# Altium PCB Steering wheel 2020.PcbDoc
Units mm, origin at the board's own origin, x right, y up, seen from the top; angles counter-clockwise.
Board outline 77.5 x 49 mm, 2 copper layers (Top Layer, Bottom Layer); 25 components, 51 nets, 167 pads, 2 vias.
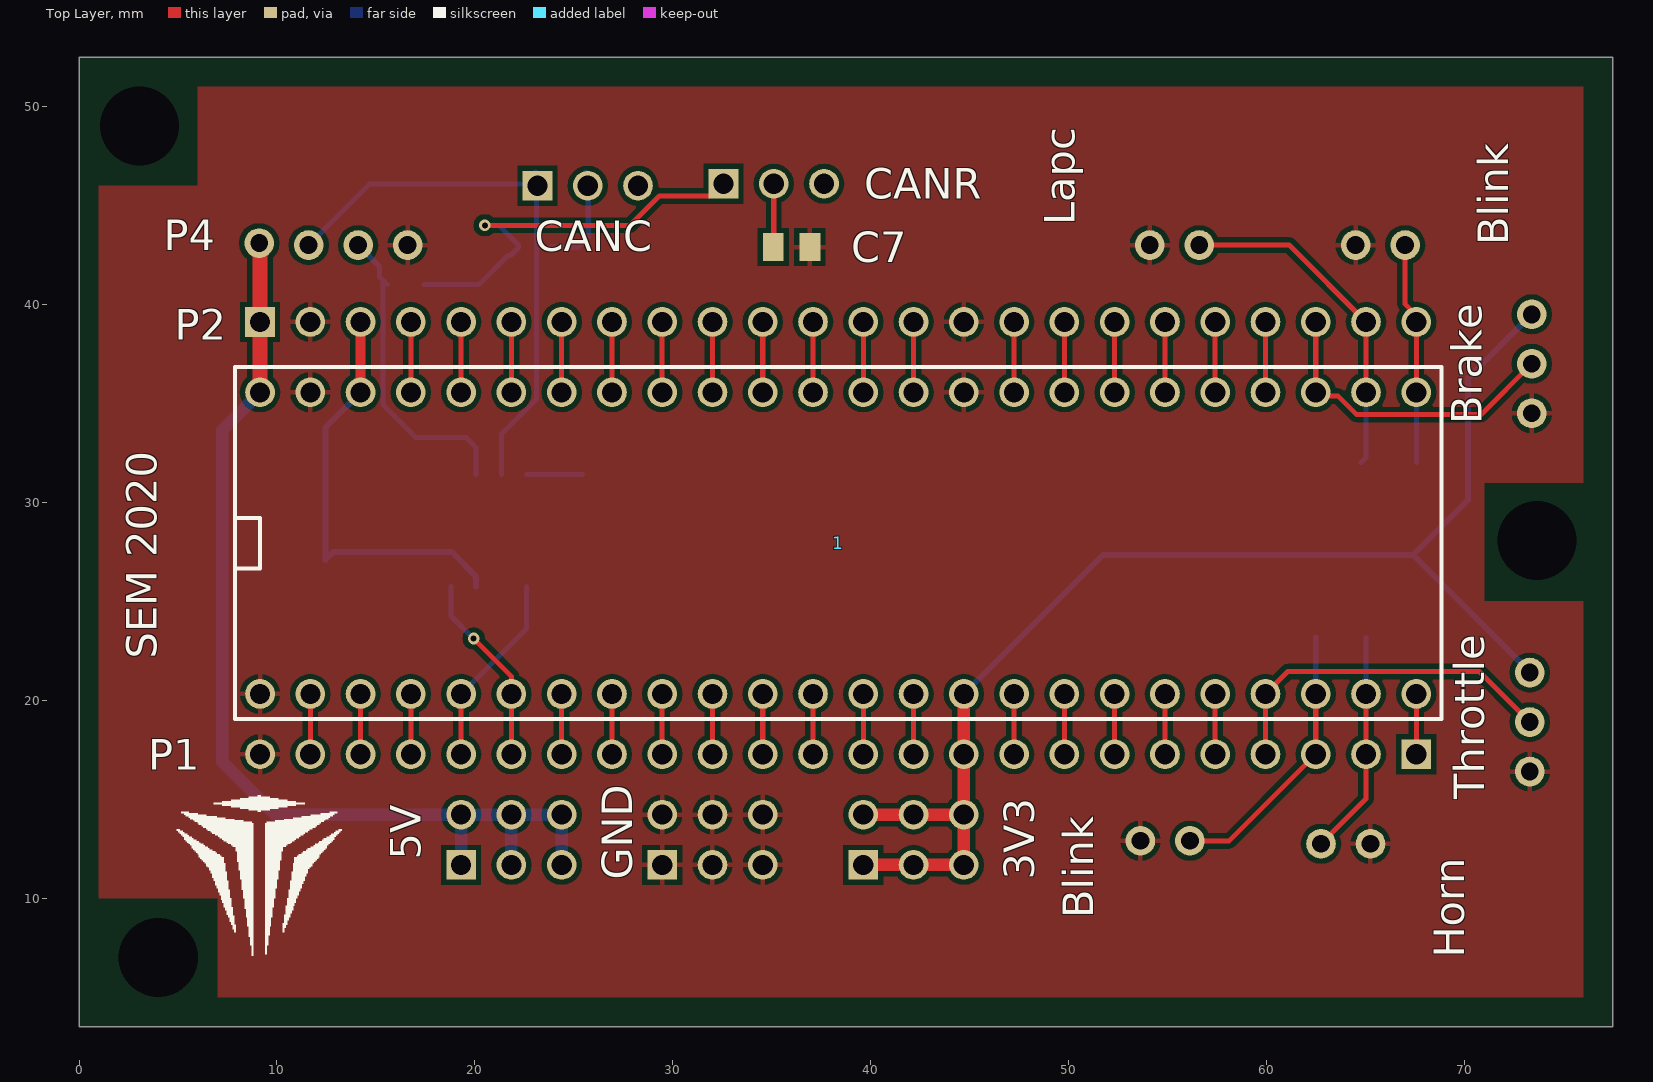
[diagram p0: Top Layer view]
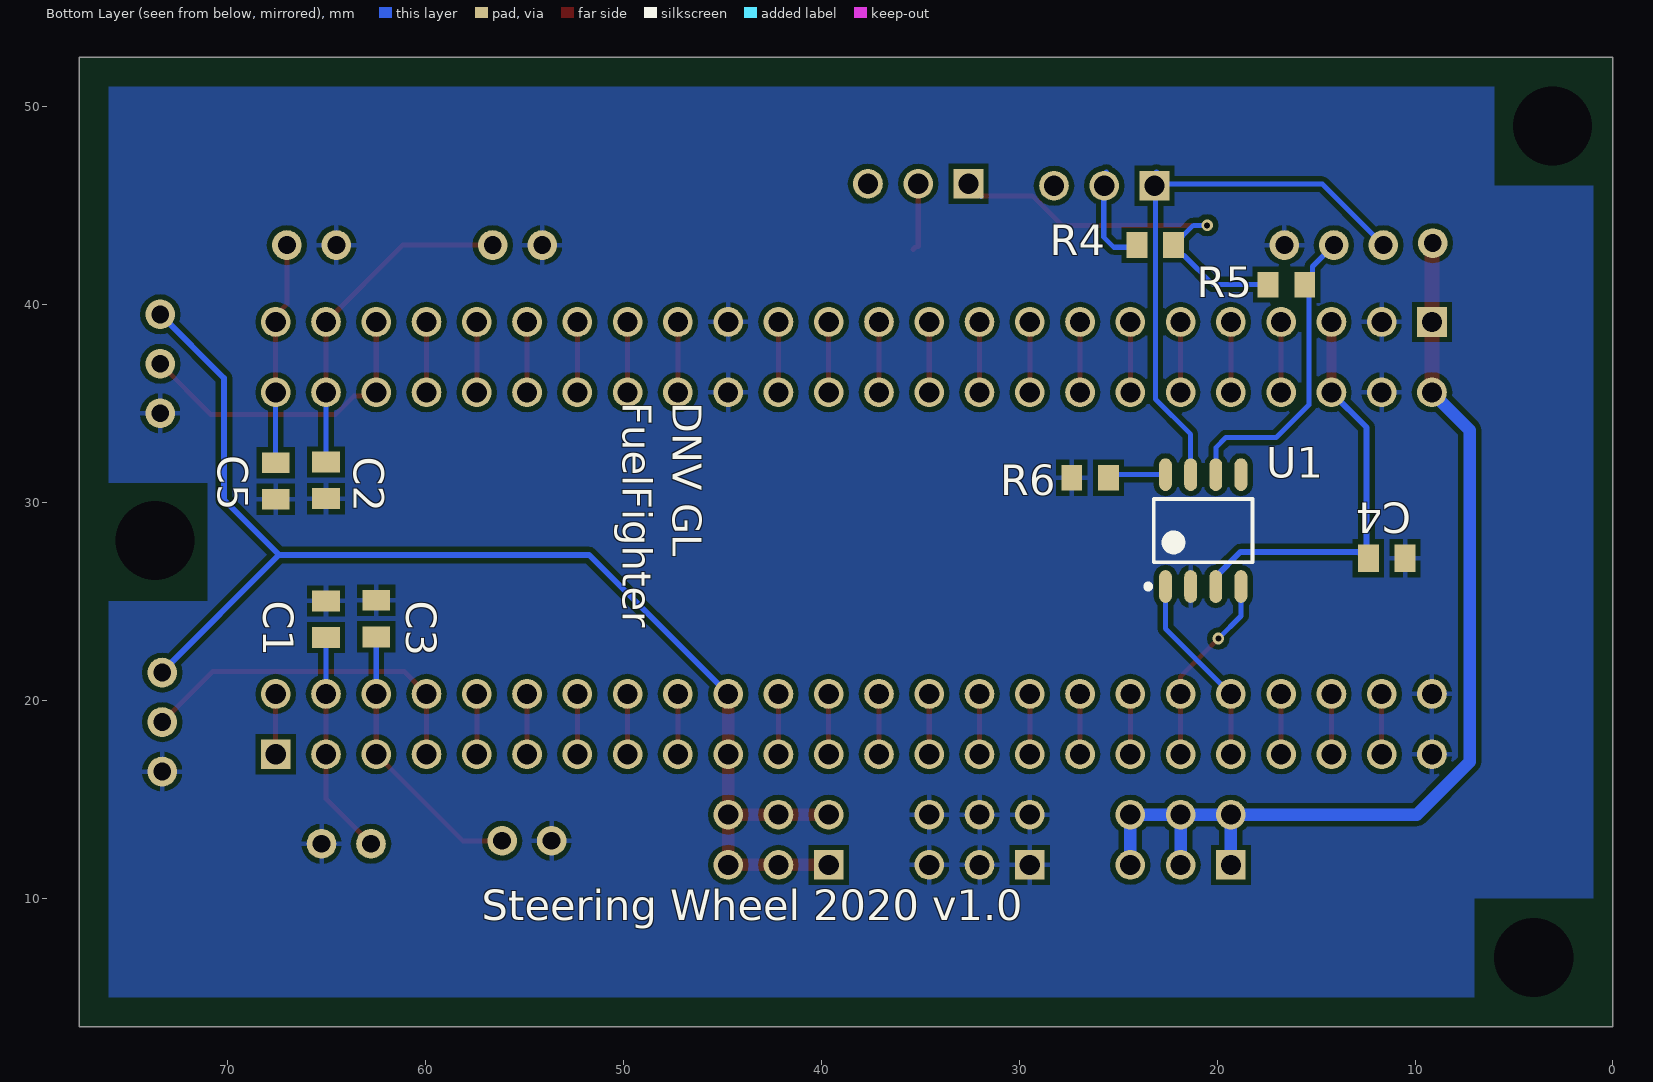
[diagram p1: Bottom Layer view, seen from below]

## Layer stack, top to bottom
Top Solder: solder mask 0.0102, Solder Resist, Dk 3.5
Top Layer: signal copper 0.0356
Dielectric 1: dielectric 0.32, FR-4, Dk 4.8
Bottom Layer: signal copper 0.0356
Bottom Solder: solder mask 0.0102, Solder Resist, Dk 3.5

## Board outline
0,3.5 0,52.5 77.5,52.5 77.5,3.5

## Design rules (kind name [scope] priority, off if disabled: settings)
Clearance [All] p1: gap=0.254 ignorepadtopadclearanceinfootprint=FALSE except(0: Arc-Hole Track-Hole SMDPad-Hole THPad-Hole Via-Hole Fill-Hole Poly-Hole Region-Hole Text-Hole)
HoleSize [All] p1: absolutevalues=TRUE maxlimit=5 minlimit=0.025 maxpercent=80.000 minpercent=20.000
PolygonConnect [All] p1: connectstyle=Relief reliefconductorwidth=0.254 reliefentries=4 polygonreliefangle="90 Angle" airgapwidth=0.254
RoutingVias [All] p1: holewidth=0.711 width=1.27 viastyle="Through Hole" minholewidth=0.711 minwidth=1.27 maxholewidth=0.711 maxwidth=1.27
SolderMaskExpansion [All] p1: expansion=0.102 istentingtop=FALSE
Width [All] p1: maxlimit=2 minlimit=0.254 preferedwidth=0.254
29 further rules are at their usual default settings.

## Classes and differential pairs
component class "Steering wheel 2020": 3V3 5v Blink Brake C1 C2 C3 C4 C5 C7 CANC CANR GND Horn Lapc P1 P2 R4 R5 R6 Throttle U1

## Components (designator, comment, footprint, x,y, rotation, side; value= is the part's Value field where it differs from the comment)
1 "teensy_3.6" teensy_3.6 7.239,19.685 r90 top
3V3 "M_2x3" PIN_HEADER_M_2x3 44.704,14.224 r180 top (schematic designator 3.3v)
5V "M_2x3" PIN_HEADER_M_2x3 24.384,14.224 r180 top (schematic designator 5v)
Blink "JST_SE_2PIN" JST_SE_2PIN 53.625,12.9 r0 top (schematic designator P3)
Blink "JST_SE_2PIN" JST_SE_2PIN 67,43 r180 top (schematic designator P5)
Brake "JST_SE_3PIN" JST_SE_3PIN 76.8,32.1 r90 top (schematic designator P9)
C1 "SMD" C_SMD_0805_pcb 65.024,24.094 r270 bottom value=100n
C2 "SMD" C_SMD_0805_pcb 65.024,31.115 r90 bottom value=100n
C3 "SMD" C_SMD_0805_pcb 62.484,24.13 r90 bottom value=100n
C4 "SMD" C_SMD_0805_pcb 11.43,27.178 r180 bottom value=100nF
C5 "SMD" C_SMD_0805_pcb 67.564,31.079 r270 bottom value=100n
C7 "SMD" C_SMD_0805_pcb 36,42.9 r0 top value=100nF
CANC "Header3" PIN_HEADER_M_1x3 28.24,46 r180 top
CANR "Header3" PIN_HEADER_M_1x3 37.64,46.1 r180 top
GND "M_2x3" PIN_HEADER_M_2x3 34.544,14.224 r180 top
Horn "JST_SE_2PIN" JST_SE_2PIN 62.75,12.75 r0 top (schematic designator P6)
Lapc "JST_SE_2PIN" JST_SE_2PIN 56.6,43 r180 top (schematic designator P7)
P1 "Header 24" PIN_HEADER_M_1x24 11.684,17.272 r0 top
P2 "Header 24" PIN_HEADER_M_1x24 65.024,39.116 r180 top
P4 "JST_SE_4PIN" JST_SE_4PIN 19,46.4 r180 top
R4 "SMD" R_SMD_0805_pcb 23.125,43 r0 bottom value=60
R5 "SMD" R_SMD_0805_pcb 16.5,41 r0 bottom value=60
R6 "SMD" R_SMD_0805_pcb 26.416,31.242 r180 bottom value=22K
Throttle "JST_SE_3PIN" JST_SE_3PIN 76.7,14 r90 top (schematic designator P8)
U1 "SN65GVD231d" SN65HVD231D_SMD 20.701,28.575 r90 bottom

## Footprints (in the part's own frame and the unit in brackets; to place one, negate y for a bottom-side part, rotate by r counter-clockwise, add the part's x,y. Pads: shape width x height; smd on the part's side, far side on the other; paste and mask are expansions set on the pad)
C_SMD_0805_pcb [mm] "Chip Capacitor, 2-Leads, Body 2,00x1,25mm, IPC Medium Density"
  rect 1.05x1.4 smd: 1(-0.925,0) 2(0.925,0)
  body extent -1,-0.62 1,0.63, height 1.35
JST_SE_2PIN [mm]
  round 1.5 hole 0.9: 1(0,0) 2(2.5,0)
  body extent -2.45,-9.2 4.95,2.3, height 6.1
JST_SE_3PIN [mm]
  round 1.5 hole 0.9: 1(7.4,3.4) 2(4.9,3.4) 3(2.4,3.4)
  body extent -0.05,-5.8 9.85,5.7, height 6.1
JST_SE_4PIN [mm]
  round 1.5 hole 0.9: 1(9.9,3.3) 2(7.4,3.4) 3(4.9,3.4) 4(2.4,3.4)
  body extent -0.05,-5.8 12.35,5.7, height 6.1
PIN_HEADER_M_1x3 [mm]
  rect 1.5x1.5 hole 1.02: 1(5.08,0)
  round 1.5 hole 1.02: 2(2.54,0) 3(0,0)
  body extent -1.27,-1.27 6.35,1.27, height 8.34
PIN_HEADER_M_1x24 [mm]
  round 1.5 hole 1.02: 1(-2.54,0) 2(0,0) 3(2.54,0) 4(5.08,0) 5(7.62,0) 6(10.16,0) 7(12.7,0) 8(15.24,0) 9(17.78,0) 10(20.32,0) 11(22.86,0) 12(25.4,0) 13(27.94,0) 14(30.48,0) 15(33.02,0) 16(35.56,0) 17(38.1,0) 18(40.64,0) 19(43.18,0) 20(45.72,0) 21(48.26,0) 22(50.8,0) 23(53.34,0)
  rect 1.5x1.5 hole 1.02: 24(55.88,0)
  body extent -3.81,-1.27 57.15,1.27, height 8.34
PIN_HEADER_M_2x3 [mm]
  rect 1.5x1.5 hole 1.02: 1(5.08,2.54)
  round 1.5 hole 1.02: 2(2.54,2.54) 3(0,2.54) 4(0,0) 5(2.54,0) 6(5.08,0)
  body extent -1.27,-1.27 6.35,3.81, height 8.34
R_SMD_0805_pcb [mm]
  rect 1.05x1.3 smd: 1(-0.925,0) 2(0.925,0)
  body extent -1,-0.6 1,0.6, height 0.65
SN65HVD231D_SMD [mm]
  oval 1.65x0.65 smd: 1(-2.825,1.905) 2(-2.825,0.635) 3(-2.825,-0.635) 4(-2.825,-1.905) 5(2.825,-1.905) 6(2.825,-0.635) 7(2.825,0.635) 8(2.825,1.905)
  silkscreen extent -2.95,-2.5 1.6,2.91, body extent -3,-2.45 3,2.45, height 1.91
teensy_3.6 [mm]
  round 1.5 hole 1.016: 0(0.635,-4.445) 1(0.635,-6.985) 2(0.635,-9.525) 3(0.635,-12.065) 4(0.635,-14.605) 5(0.635,-17.145) 6(0.635,-19.685) 7(0.635,-22.225) 8(0.635,-24.765) 9(0.635,-27.305) 10(0.635,-29.845) 11(0.635,-32.385) 12(0.635,-34.925) 13(15.875,-34.925) 14(15.875,-32.385) 15(15.875,-29.845) 16(15.875,-27.305) 17(15.875,-24.765) 18(15.875,-22.225) 19(15.875,-19.685) 20(15.875,-17.145) 21(15.875,-14.605) 22(15.875,-12.065) 23(15.875,-9.525) 24(0.635,-40.005) 25(0.635,-42.545) 26(0.635,-45.085) 27(0.635,-47.625) 28(0.635,-50.165) 29(0.635,-52.705) 30(0.635,-55.245) 31(0.635,-57.785) 32(0.635,-60.325) 33(15.875,-60.325) 34(15.875,-57.785) 35(15.875,-55.245) 36(15.875,-52.705) 37(15.875,-50.165) 38(15.875,-47.625) 39(15.875,-45.085) +3V3(0.635,-37.465) +3V3(15.875,-6.985) A21(15.875,-42.545) A22(15.875,-40.005) AGND(15.875,-4.445) GND(0.635,-1.905) GND(15.875,-37.465) VIN(15.875,-1.905)
  silkscreen extent -0.64,-61.59 17.15,-0.63, body extent -0.62,-61.66 17.16,0.7, height 7.49

## Part data
3V3 5V GND: library part PIN_HEADER_M_2x3
C1 C2 C3 C4 C5 C7: library part C_SMD_0805
CANC CANR: library part PIN_HEADER_M_1x3
P1 P2: library part PIN_HEADER_M_1x24
R4 R5 R6: library part R_SMD_0805
U1: library part SN65HVD231D_SMD

## Free pads (board coordinates)
  round 2.54 hole 4: 2(3.048,49.022) 2(73.66,28.067)
  oval 2.54x2.552 hole 4: 2(4,7)

## Via types
v1: diameter 0.6, hole 0.3, Top Layer to Bottom Layer, tented both sides, 2 vias

## Nets (pads, with @x,y where several pads share a name; then routed paths per layer and width w, separated by ;. In a path a pad name is that pad's centre, name@x,y a point inside that pad or via, vN(x,y) a via of type N, cw(c..) or ccw(c..) an arc to the next point about the centre after c; other vN are vias at no path point)
+3.3: 1.+3V3 3V3.1 3V3.2 3V3.3 3V3.4 3V3.5 3V3.6 Brake.1 C4.1 P1.15 P2.22 Throttle.1 U1.3 | length 89.3
  Top Layer w0.508: 1.+3V3@14.224,35.56 P2.22
  Top Layer w0.635: 3V3.1 3V3.2 3V3.3 3V3.4 ; 3V3.6 3V3.5 3V3.4 ; 1.+3V3@44.704,20.32 P1.15 3V3.4
  Bottom Layer w0.305: 1.+3V3@14.224,35.56 12.446,33.782 12.446,27.087 12.859,27.5 18.816,27.5 20.066,26.25 U1.3 ; 1.+3V3@44.704,20.574 44.704,20.32 51.734,27.35 67.4,27.35 ; Throttle.1 73.3,21.45 67.4,27.35 ; Brake.1 70.175,36.275 70.175,30.125 67.4,27.35
+5: 1.VIN 5V.1 5V.2 5V.3 5V.4 5V.5 5V.6 P2.24 P4.1 | length 52.9
  Top Layer w0.762: 1.VIN P2.24 P4.1@9.144,43.1
  Bottom Layer w0.635: 1.VIN 7.239,33.655 7.239,16.891 9.906,14.224 5V.6 ; 5V.1 5V.6 ; 5V.2 5V.5 ; 5V.3 5V.4 5V.5 ; 5V.6 5V.5
GND: 1.AGND 1.GND Blink.1@53.625,12.9 Blink.2@64.5,43 Brake.3 C1.1 C2.1 C3.2 C4.2 C5.2 C7.2 GND.1 GND.2 GND.3 GND.4 GND.5 GND.6 Horn.2 Lapc.2 P1.1 P2.10 P2.23 P4.4 R6.1 Throttle.3 U1.2
Net1_0: 1.0 P1.2 | length 3
  Top Layer w0.254: P1.2 1.0
Net1_1: 1.1 P1.3 | length 3
  Top Layer w0.254: P1.3 1.1
Net1_2: 1.2 P1.4 | length 3
  Top Layer w0.254: P1.4 1.2
Net1_3: 1.3 P1.5 U1.1 | length 9.8
  Top Layer w0.254: P1.5 1.3
  Bottom Layer w0.254: 1.3 22.606,23.622 U1.1
Net1_4: 1.4 P1.6 U1.4 | length 9.7
  Top Layer w0.254: v1(19.939,23.114) 21.844,21.209 1.4 P1.6
  Bottom Layer w0.254: U1.4 18.796,24.257 v1(19.939,23.114)
Net1_5: 1.5 P1.7 | length 3
  Top Layer w0.254: P1.7 1.5
Net1_6: 1.6 P1.8 | length 3
  Top Layer w0.254: P1.8 1.6
Net1_7: 1.7 P1.9 | length 3
  Top Layer w0.254: P1.9 1.7
Net1_8: 1.8 P1.10 | length 3
  Top Layer w0.254: P1.10 1.8
Net1_9: 1.9 P1.11 | length 3
  Top Layer w0.254: P1.11 1.9
Net1_10: 1.10 P1.12 | length 3
  Top Layer w0.254: P1.12 1.10
Net1_11: 1.11 P1.13 | length 3
  Top Layer w0.254: P1.13 1.11
Net1_12: 1.12 P1.14 | length 3
  Top Layer w0.254: P1.14 1.12
Net1_13: 1.13 P2.11 | length 3.6
  Top Layer w0.254: 1.13 P2.11
Net1_14: 1.14 P2.12 | length 3.6
  Top Layer w0.254: 1.14 P2.12
Net1_15: 1.15 P2.13 | length 3.6
  Top Layer w0.254: 1.15 P2.13
Net1_16: 1.16 P2.14 | length 3.6
  Top Layer w0.254: 1.16 P2.14
Net1_17: 1.17 P2.15 | length 3.6
  Top Layer w0.254: 1.17 P2.15
Net1_18: 1.18 P2.16 | length 3.6
  Top Layer w0.254: 1.18 P2.16
Net1_19: 1.19 P2.17 | length 3.6
  Top Layer w0.254: 1.19 P2.17
Net1_20: 1.20 P2.18 | length 3.6
  Top Layer w0.254: 1.20 P2.18
Net1_21: 1.21 P2.19 | length 3.6
  Top Layer w0.254: 1.21 P2.19
Net1_22: 1.22 P2.20 | length 3.6
  Top Layer w0.254: 1.22 P2.20
Net1_23: 1.23 P2.21 | length 3.6
  Top Layer w0.254: 1.23 P2.21
Net1_24: 1.24 P1.16 | length 3
  Top Layer w0.254: P1.16 1.24
Net1_25: 1.25 P1.17 | length 3
  Top Layer w0.254: P1.17 1.25
Net1_26: 1.26 P1.18 | length 3
  Top Layer w0.254: P1.18 1.26
Net1_27: 1.27 P1.19 | length 3
  Top Layer w0.254: P1.19 1.27
Net1_28: 1.28 P1.20 | length 3
  Top Layer w0.254: P1.20 1.28
Net1_29: 1.29 P1.21 Throttle.2 | length 17.9
  Top Layer w0.254: P1.21 1.29 61.075,21.451 70.749,21.451 Throttle.2
Net1_30: 1.30 Blink.2@56.125,12.9 C3.1 P1.22 | length 14.1
  Top Layer w0.254: Blink.2@56.125,12.9 58.112,12.9 P1.22 1.30
  Bottom Layer w0.254: 1.30 C3.1
Net1_31: 1.31 C1.2 Horn.1 P1.23 | length 11.4
  Top Layer w0.254: Horn.1 65.024,15.024 P1.23 1.31
  Bottom Layer w0.254: 1.31 C1.2
Net1_32: 1.32 P1.24 | length 3
  Top Layer w0.254: P1.24 1.32
Net1_33: 1.33 Blink.1@67,43 C5.1 P2.1 | length 11.3
  Top Layer w0.254: Blink.1@67.02,42.98 67,43 67,40.017 67.544,39.473 67.544,39.136 P2.1 1.33
  Bottom Layer w0.254: C5.1 1.33
Net1_34: 1.34 C2.2 Lapc.1 P2.2 | length 17.3
  Top Layer w0.254: Lapc.1 61.14,43 P2.2 1.34
  Bottom Layer w0.254: C2.2@64.77,32.004 65.024,32.258 1.34
Net1_35: 1.35 Brake.2 P2.3 | length 16
  Top Layer w0.254: P2.3 1.35 62.674,35.37 63.615,35.37 64.556,34.429 70.829,34.429 Brake.2
Net1_36: 1.36 P2.4 | length 3.6
  Top Layer w0.254: 1.36 P2.4
Net1_37: 1.37 P2.5 | length 3.6
  Top Layer w0.254: 1.37 P2.5
Net1_38: 1.38 P2.6 | length 3.6
  Top Layer w0.254: 1.38 P2.6
Net1_39: 1.39 P2.7 | length 3.6
  Top Layer w0.254: 1.39 P2.7
Net1_A21: 1.A21 P2.8 | length 3.6
  Top Layer w0.254: 1.A21 P2.8
Net1_A22: 1.A22 P2.9 | length 3.6
  Top Layer w0.254: 1.A22 P2.9
NetC7_1: C7.1 CANR.2 | length 3.4
  Top Layer w0.254: C7.1@35.1,42.925 CANR.2 ; C7.1@35.238,42.9 C7.1@35.365,42.773
NetCANC_1: CANC.1 P4.2 U1.7 | length 29.1
  Bottom Layer w0.254: P4.2 14.677,46.077 22.437,46.077 23.06,46.7 23.114,46.646 23.114,35.214 21.336,33.436 U1.7
NetCANC_2: CANC.2 R4.2 | length 5.4
  Bottom Layer w0.254: R4.2@23.858,42.89 25.219,42.89 25.727,43.398 25.727,46.573 CANC.2@25.6,46.7
NetCANR_1: CANR.1 R4.1 R5.2 | length 21.6
  Top Layer w0.254: v1(20.5,44) 27.839,44 29.316,45.477 31.937,45.477 CANR.1
  Bottom Layer w0.254: R5.2 20.2,41 21.677,42.477 21.802,42.477 22.2,42.875 R4.1 21.2,44 v1(20.5,44) ; CANR.1@31.925,45.465 CANR.1
NetP4_3: P4.3 R5.1 U1.6 | length 15.9
  Bottom Layer w0.254: P4.3 15.177,41.923 15.177,41.398 R5.1@15.367,41.208 ; R5.1 R5.1@15.367,41.208 ; U1.6 20.066,32.766 19.558,33.274 17.018,33.274 15.367,34.925 R5.1@15.367,41.208
NetR6_2: R6.2 U1.8 | length 2.8
  Bottom Layer w0.254: U1.8 R6.2@25.441,31.4
pads on no net: CANC.3 CANR.3 U1.5

## Polygon pours and split planes (outlines as drawn)
GND on Top Layer "Top Layer-GND" (solid, pour order 15): 76,51 6,51 6,46 1,46 1,10 7,10 7,5 76,5 76,25 71,25 71,31 76,31
GND on Bottom Layer "Bottom Layer-GND" (solid, pour order 13): 1,46 6,46 6,51 76,51 76,31 71,31 71,25 76,25 76,5 7,5 7,10 1,10

## Silkscreen, mask and mechanical layers (free items; w line width, h text height)
Top Overlay:
  drawing of 5 lines, arcs and shapes, not listed
  text "SEM 2020" at 3.937,22.098 h1.52 r90
Bottom Overlay:
  text "DNV GL / FuelFighter" at 50.546,35.052 h2.54 r90
  text "Steering Wheel 2020 v1.0" at 57.15,8.89 h1.52
Mechanical 1:
  lines w0.254: 0.254,4 76.962,4 76.962,52.07 0.254,52.07 0.254,4